# Altium PCB deepshark_pcb.PcbDoc (part 2 of 2)
Units mm, origin at the board's own origin, x right, y up, seen from the top; angles counter-clockwise.
Board outline 200 x 80 mm, 2 copper layers (Top Layer, Bottom Layer); 211 components, 120 nets, 671 pads, 118 vias.
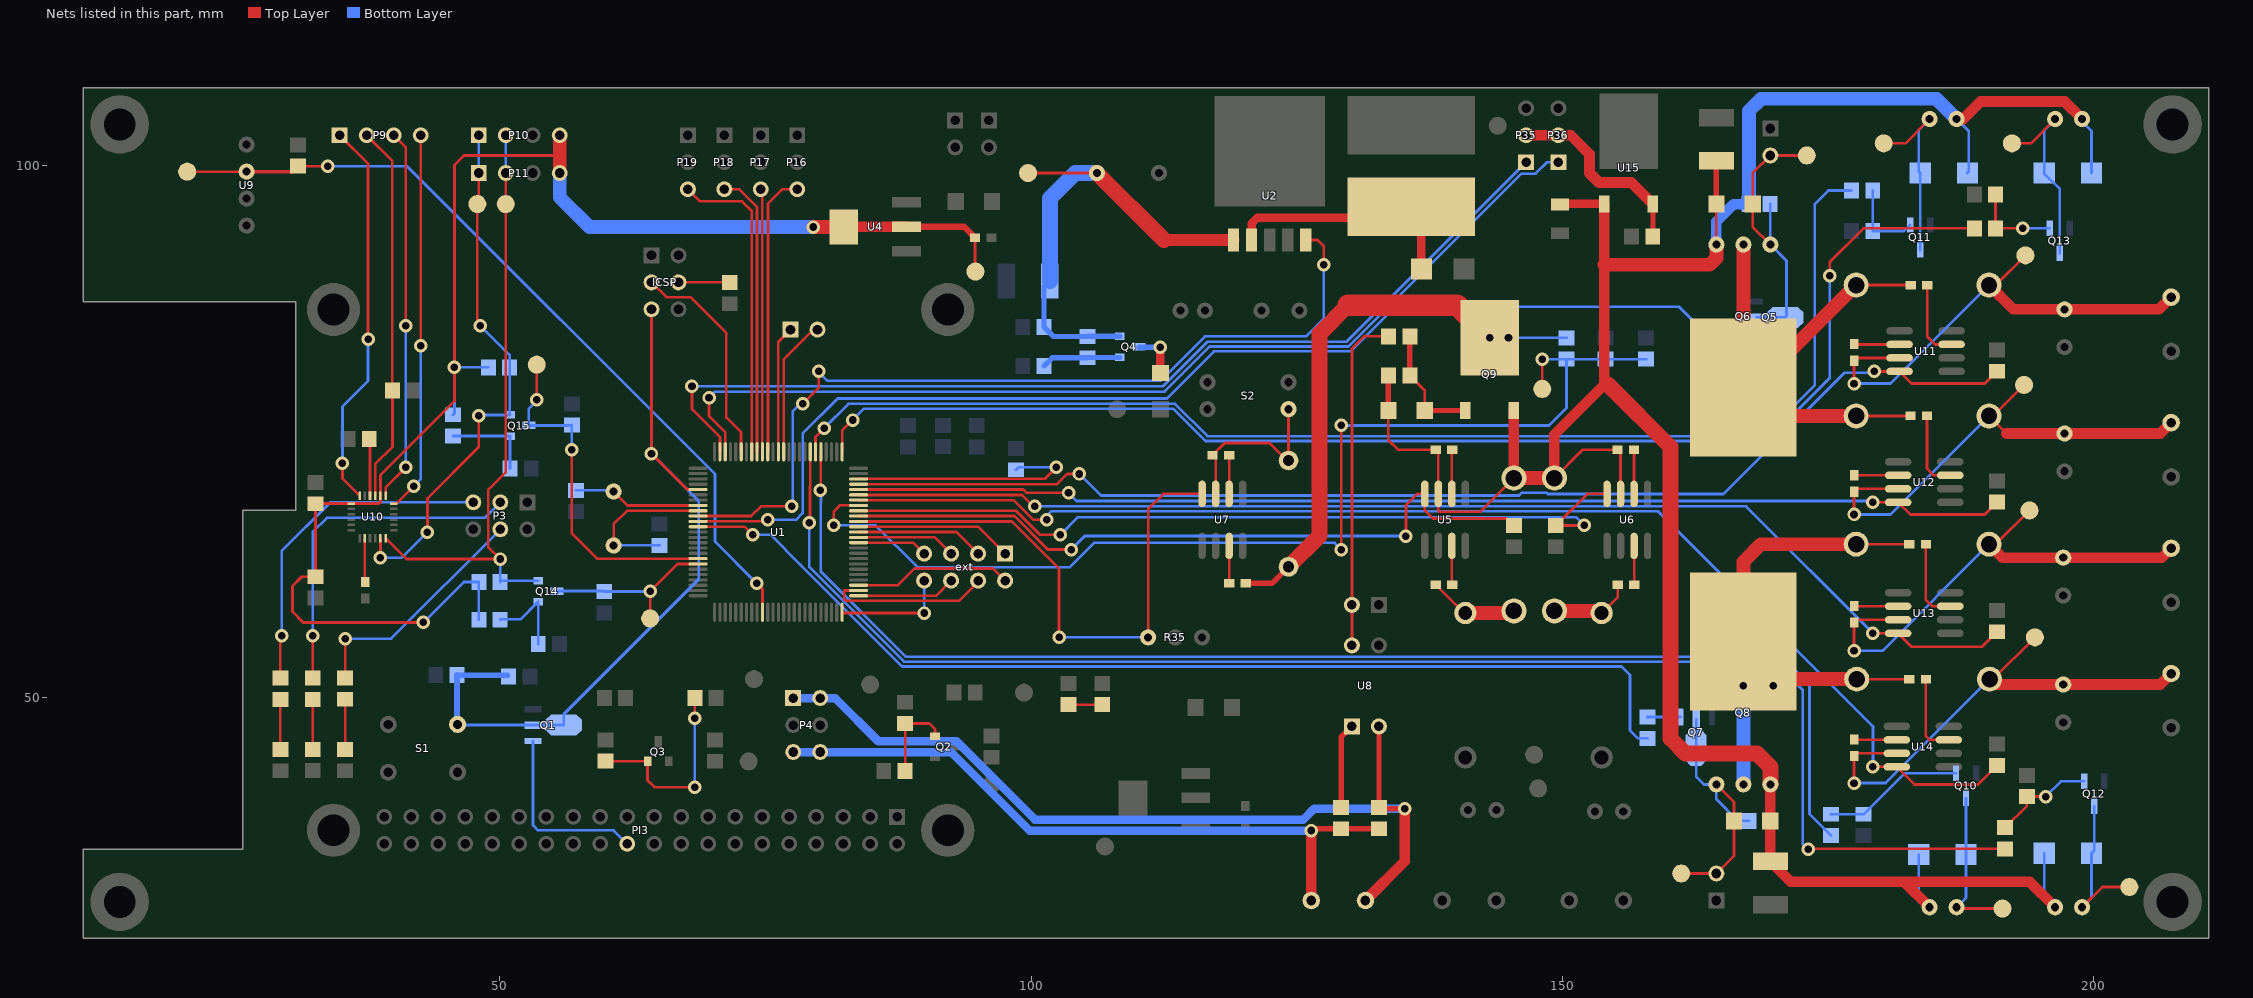
[diagram p2: the nets of this part, all layers, seen from the top]

## Via types
v1: diameter 1.27, hole 0.711, Top Layer to Bottom Layer, 118 vias

## Nets (pads, with @x,y where several pads share a name; then routed paths per layer and width w, separated by ;. In a path a pad name is that pad's centre, name@x,y a point inside that pad or via, vN(x,y) a via of type N, cw(c..) or ccw(c..) an arc to the next point about the centre after c; other vN are vias at no path point) (continued)
Net10_1: 10.1 C17.1 C25.2 C28.1 P10.4 P11.4 R45.1 R46.2 R48.1 R49.2 U4.2 U4.4 U10.8 U10.13 | length 143.4
  Top Layer w0.254: v1(42.799,57.023) 31.496,57.023 30.48,58.039 30.48,60.452 31.353,61.325 C28.1@32.639,61.325 C25.2@32.639,68.199 32.649,68.209 U10.13@36.02,68.209 38.618,68.209 38.755,68.346 U10.8@38.755,68.959 38.755,70.886 45.72,77.851 v1(45.72,81.026) 45.72,100.076 46.609,100.965 55.626,100.965 ; v1(79.502,94.234) v1@79.516,94.248 ; C17.1@94.711,93.218 94.711,90.074 10.1@94.742,90.043
  Top Layer w0.6: U4.2@88.265,94.248 93.681,94.248 C17.1@94.711,93.218
  Top Layer w1: U4.4@82.365,94.248 U4.2@88.265,94.248
  Top Layer w1.3: P11.4@55.626,99.314 55.626,100.965 P10.4@55.626,102.87 ; v1@79.516,94.248 U4.4@82.365,94.248
  Bottom Layer w0.254: v1(42.799,57.023) 46.609,60.833 R46.2@48.022,60.833 R45.1@48.022,57.277 ; R48.1@45.593,76.565 45.72,76.692 v1(45.72,81.026) R49.2@48.911,81.026
  Bottom Layer w1.3: P11.4@55.626,99.314 55.626,97.028 58.42,94.234 v1(79.502,94.234)
Net13_1: 13.1 C20.2 P7.2 Q5.2 Q6.1 R23.2 | length 27.2
  Top Layer w0.254: Q6.1@169.545,92.583 167.885,94.243 C20.2@167.885,96.393 167.885,99.305 P7.2@169.545,100.965 13.1@172.974,100.965
  Bottom Layer w0.254: Q5.2@168.242,85.725 Q5.2@170.942,85.725 171.069,85.852 171.069,91.059 Q6.1@169.545,92.583 169.545,96.377 R23.2@169.529,96.393
Net14_1: 14.1 C21.2 P8.2 Q7.2 Q8.1 R25.2 | length 26
  Top Layer w0.254: 14.1@161.163,33.401 P8.2@164.465,33.401 166.116,35.052 C21.2@166.116,38.354 166.116,40.132 Q8.1@164.465,41.783
  Bottom Layer w0.254: Q7.2@162.56,47.928 Q7.2@162.56,45.228 162.56,42.545 163.322,41.783 Q8.1@164.465,41.783 164.465,40.386 166.497,38.354 R25.2@167.529,38.354
Net15_1: 15.1 C24.2 R30.1 R31.2 U1.93 | length 105.2
  Top Layer w0.254: v1(81.407,66.167) 81.407,67.437 82.025,68.055 83.727,68.055 U1.93@83.75,68.032 ; v1(129.159,63.881) v1(129.159,75.565) ; 15.1@148.082,78.994 v1(148.082,81.788)
  Bottom Layer w0.254: v1(81.407,66.167) 85.344,66.167 89.281,62.23 103.632,62.23 105.918,64.516 128.524,64.516 v1(129.159,63.881) ; v1(129.159,75.565) 148.717,75.565 150.368,77.216 R30.1@150.368,81.804 ; v1(148.082,81.788) 148.098,81.804 R30.1@150.368,81.804 ; R31.2@157.861,81.804 C24.2@154.051,81.804 R30.1@150.368,81.804
Net16_1: 16.1 D11.1 P27.1 Q10.1 | length 15
  Top Layer w0.254: P27.1@187.071,30.226 187.198,30.099 16.1@191.389,30.099
  Bottom Layer w0.254: P27.1@187.071,30.226 187.96,31.115 D11.1@187.96,35.179 Q10.1@187.96,40.481
Net17_1: 17.1 D12.1 P29.1 Q11.1 | length 18.1
  Top Layer w0.254: 17.1@180.213,102.108 182.245,102.108 P29.1@184.531,104.394
  Bottom Layer w0.254: Q11.1@183.642,92.075 D12.1@183.642,99.314 183.515,99.441 183.515,103.378 P29.1@184.531,104.394
Net18_1: 18.1 D13.1 P28.1 Q12.1 | length 15.2
  Top Layer w0.254: P28.1@198.882,30.226 200.787,32.131 18.1@203.327,32.131
  Bottom Layer w0.254: P28.1@198.882,30.226 199.771,31.115 D13.1@199.771,35.306 200.025,35.56 Q12.1@200.025,39.719
Net19_1: 19.1 D14.1 P30.1 Q13.1 | length 18.7
  Top Layer w0.254: 19.1@192.278,102.108 194.056,102.108 P30.1@196.342,104.394
  Bottom Layer w0.254: P30.1@196.342,104.394 195.326,103.378 D14.1@195.326,99.314 195.294,99.282 196.784,97.792 Q13.1@196.784,91.757
Net20_1: 20.1 R44.1 U1.60 U9.2 | length 76.7
  Top Layer w0.254: 20.1@20.574,99.441 U9.2@26.162,99.441 ; R44.1@30.464,99.441 R44.1@30.988,99.965 33.766,99.965 v1(33.782,99.949) ; v1(74.168,60.706) 74.7,60.174 U1.60@74.7,57.982
  Top Layer w0.3: U9.2@26.162,99.441 R44.1@30.464,99.441
  Bottom Layer w0.254: v1(33.782,99.949) 41.275,99.949 70.231,70.993 70.231,64.643 v1(74.168,60.706)
Net21_1: 21.1 P10.2 P11.2 Q14.3 R46.1 U10.24 | length 58.3
  Top Layer w0.254: U10.24@39.245,64.959 41.212,62.992 v1(50.038,62.992) 48.895,64.135 48.895,69.469 50.546,71.12 21.1@50.546,96.393 P11.2@50.546,99.314
  Bottom Layer w0.254: R46.1@50.022,60.833 50.038,60.849 v1(50.038,62.992) ; R46.1@50.149,60.96 Q14.3@53.594,60.96 ; P11.2@50.546,99.314 P10.2@50.546,102.87
Net22_1: 22.1 Q14.2 R47.1 U1.44 | length 16.9
  Top Layer w0.254: 22.1@64.135,57.404 v1(64.135,59.944) 66.723,62.532 U1.44@68.65,62.532
  Bottom Layer w0.254: Q14.2@55.359,59.976 59.769,59.976 R47.1@59.817,59.928 64.119,59.928 v1(64.135,59.944)
Net23_1: 23.1 P10.1 P11.1 Q15.3 R49.1 U10.23 | length 50.7
  Top Layer w0.254: v1(38.735,63.119) 38.755,63.139 U10.23@38.755,64.959 ; v1@43.18,65.659 43.18,68.707 48.006,73.533 v1(48.006,76.454) ; P11.1@48.006,99.314 48.006,96.52 23.1@47.879,96.393 47.879,85.217 v1(48.133,84.963)
  Bottom Layer w0.254: v1(38.735,63.119) 40.767,63.119 v1(43.18,65.532) ; v1(48.006,76.454) 48.101,76.549 Q15.3@50.94,76.549 50.911,76.578 R49.1@50.911,81.026 50.911,82.185 v1(48.133,84.963) ; P11.1@48.006,99.314 P10.1@48.006,102.87
Net24_1: 24.1 Q15.2 R50.1 U1.43 | length 33.1
  Top Layer w0.254: v1(53.467,77.978) 53.467,80.899 24.1@53.721,81.153 ; v1(56.769,73.279) 56.769,65.405 59.142,63.032 U1.43@68.65,63.032
  Bottom Layer w0.254: v1(53.467,77.978) 53.467,77.851 52.705,77.089 Q15.2@52.705,75.565 56.737,75.565 R50.1@56.769,75.597 v1(56.769,73.279)
Net25_1: 25.1 C31.1 P20.2 R52.2 R54.2 U11.7 | length 46.2
  Top Layer w0.254: v1(177.419,79.502) R54.2@177.419,81.661 177.673,81.915 U11.7@181.7,81.915 ; R52.2@190.119,88.773 190.754,88.773 25.1@193.548,91.567
  Top Layer w1: R52.2@190.119,88.773 192.405,86.487 C31.1@197.231,86.487 206.121,86.487 P20.2@207.264,87.63
  Bottom Layer w0.254: v1(177.419,79.502) 180.848,79.502 R52.2@190.119,88.773
Net26_1: 26.1 C32.1 P21.2 R56.2 R58.2 U12.7 | length 45.7
  Top Layer w0.254: v1(177.419,67.183) R58.2@177.419,69.311 177.704,69.596 U12.7@181.573,69.596 ; 191.77,74.803 R56.2@190.119,76.454 190.5,76.454 26.1@193.421,79.375
  Top Layer w1: 191.77,74.803 C32.1@197.231,74.803 206.248,74.803 P21.2@207.264,75.819
  Bottom Layer w0.254: v1(177.419,67.183) 180.848,67.183 R56.2@190.119,76.454
Net27_1: 27.1 C33.1 P22.2 R60.2 R62.2 U13.7 | length 46.9
  Top Layer w0.254: v1(177.419,54.356) R62.2@177.419,57.023 177.673,57.277 U13.7@181.573,57.277 ; R60.2@190.119,64.389 190.754,64.389 27.1@193.929,67.564
  Top Layer w1: R60.2@190.119,64.389 191.389,63.119 C33.1@197.104,63.119 206.375,63.119 P22.2@207.264,64.008
  Bottom Layer w0.254: v1(177.419,54.356) 180.086,54.356 R60.2@190.119,64.389
Net28_1: 28.1 C34.1 P23.2 R64.2 R66.2 U14.7 | length 47.1
  Top Layer w0.254: v1(177.419,41.91) R66.2@177.419,44.45 177.673,44.704 U14.7@181.446,44.704 ; R64.2@190.173,51.689 190.5,51.689 28.1@194.437,55.626
  Top Layer w1: R64.2@190.173,51.689 190.681,51.181 C34.1@197.104,51.181 206.228,51.181 P23.2@207.264,52.217
  Bottom Layer w0.254: v1(177.419,41.91) 180.394,41.91 R64.2@190.173,51.689
NetC2_1: C2.1 U1.34 Y1.2 | length 14.8
  Top Layer w0.254: Y1.2@60.706,64.262 60.706,66.294 61.944,67.532 U1.34@68.65,67.532
  Bottom Layer w0.254: Y1.2@60.706,64.262 60.722,64.278 C2.1@65.024,64.278
NetC3_1: C3.1 U1.33 Y1.1 | length 12.1
  Top Layer w0.254: Y1.1@60.706,69.342 62.016,68.032 U1.33@68.65,68.032
  Bottom Layer w0.254: C3.1@57.15,69.453 60.595,69.453 Y1.1@60.706,69.342
NetC4_2: C4.2 U1.98 | length 23
  Top Layer w0.254: U1.98@83.75,70.532 101.266,70.532 v1(102.362,71.628)
  Bottom Layer w0.254: C4.2@98.552,71.39 98.79,71.628 v1(102.362,71.628)
NetC8_1: C8.1 Q2.1 R3.1 | length 8.2
  Top Layer w0.254: C8.1@88.122,43.053 88.138,43.069 R3.1@88.138,47.514 90.408,47.514 90.934,46.988 Q2.1@90.934,46.311
NetC9_1: C9.1 Q3.1 R6.2 | length 18.8
  Top Layer w0.254: C9.1@59.944,43.974 59.961,43.957 Q3.1@63.893,43.957 63.893,42.176 64.54,41.529 v1(68.326,41.529) ; v1(68.326,48.006) 68.326,49.895 R6.2@68.342,49.911
  Bottom Layer w0.254: v1(68.326,41.529) v1(68.326,48.006)
NetC20_1: C20.1 C21.1 C22.1 C35.2 D9.K D10.K D11.2 D12.2 D13.2 D14.2 P27.2 P28.2 P29.2 P30.2 Q6.3 Q8.3 Q9.3 R15.2 R17.2 R19.2 R21.2 R23.1 R25.1 R27.1 U5.7 U6.7 U15.1 | length 260.2
  Top Layer w0.254: C22.1@133.604,76.962 133.604,74.168 134.493,73.279 R17.2@138.049,73.279 138.303,73.025 U5.7@138.303,69.125 138.303,67.564 138.43,67.437 142.24,67.437 R15.2@145.415,70.612 R15.2@145.415,70.612 ; R27.1@133.604,80.248 R27.1@133.62,80.264 ; R19.2@149.225,70.612 151.892,73.279 R21.2@155.163,73.279 155.448,72.994 U6.7@155.448,69.125 ; C35.2@149.733,96.346 C35.2@149.788,96.401 ; 153.925,79.376 154.304,79.376 ; Q6.3@164.465,92.583 C20.1@164.465,96.393 ; D10.K@169.536,34.569 D10.K@169.545,34.56 ; C21.1@169.536,38.354 C21.1@169.545,38.363 ; P27.2@184.531,30.226 P27.2@184.531,30.353 ; P29.2@187.071,104.394 P29.2@187.706,104.394
  Top Layer w0.5: C22.1@133.604,76.962 R27.1@133.604,80.248 ; C20.1@164.465,96.393 D9.K@164.465,100.457
  Top Layer w0.8: C35.2@149.788,96.401 U15.1@153.925,96.401
  Top Layer w1: R15.2@145.415,70.612 Q9.3@145.414,76.97 ; R19.2@149.225,70.612 149.225,74.676 153.925,79.376 153.925,90.678 U15.1@153.925,96.401 ; D10.K@169.536,34.569 C21.1@169.536,38.354 ; D10.K@169.545,34.56 171.466,32.639 182.118,32.639 ; C21.1@169.545,38.363 Q8.3@169.545,41.783 ; P27.2@184.531,30.226 182.118,32.639 ; P29.2@187.706,104.394 189.357,106.045 197.231,106.045 P30.2@198.882,104.394 ; P28.2@196.342,30.226 193.929,32.639 182.118,32.639
  Top Layer w1.3: R15.2@145.415,70.612 R19.2@149.225,70.612 ; 153.925,90.678 163.83,90.678 164.465,91.313 Q6.3@164.465,92.583
  Top Layer w1.5: 154.304,79.376 160.147,73.533 160.147,46.101 161.544,44.704 168.275,44.704 169.545,43.434 Q8.3@169.545,41.783
  Bottom Layer w0.254: R25.1@169.529,38.354 169.529,41.767 Q8.3@169.545,41.783 ; D11.2@183.515,35.179 183.515,31.242 P27.2@184.531,30.226 ; P29.2@187.071,104.394 188.214,103.251 188.214,99.441 D12.2@188.087,99.314 ; D13.2@195.326,35.306 195.326,31.242 P28.2@196.342,30.226 ; P30.2@198.882,104.394 198.882,104.14 199.771,103.251 D14.2@199.771,99.314
  Bottom Layer w1: Q6.3@164.465,92.583 164.465,94.742 166.116,96.393 R23.1@167.529,96.393
  Bottom Layer w1.3: R23.1@167.529,96.393 167.529,105.172 168.656,106.299 185.166,106.299 P29.2@187.071,104.394
NetC22_2: C22.2 Q9.1 R27.2 R28.1 | length 11.4
  Top Layer w0.254: R27.2@135.62,80.264 137.024,78.86 C22.2@137.024,76.962 C22.2@137.032,76.97
  Top Layer w0.5: R27.2@135.62,80.264 R28.1@135.62,83.947 ; C22.2@137.032,76.97 Q9.1@140.844,76.97
NetC26_2: C26.2 U10.10 | length 5.4
  Top Layer w0.254: C26.2@37.703,74.295 37.775,74.223 U10.10@37.775,68.959
NetC27_1: C27.1 U10.20 | length 4.1
  Top Layer w0.254: U10.20@37.285,64.959 37.285,60.886 C27.1@37.338,60.833
NetC29_1: C29.1 Q14.1 R45.2 | length 8.3
  Bottom Layer w0.254: R45.2@50.022,57.277 50.063,57.318 51.943,57.318 Q14.1@53.596,58.972 53.61,58.958 C29.1@53.61,54.991
NetC30_1: C30.1 Q15.1 R48.2 | length 8.4
  Bottom Layer w0.254: R48.2@45.593,74.565 45.597,74.561 Q15.1@50.942,74.561 C30.1@50.943,71.501
NetC36_2: C36.2 P35.2 P36.2 U15.3 | length 18.7
  Top Layer w0.254: C36.2@158.48,93.345 C36.2@158.495,93.36
  Top Layer w0.5: C36.2@158.495,93.36 U15.3@158.495,96.401
  Top Layer w1: P35.2@146.558,102.87 P36.2@149.606,102.87 150.749,102.87 152.527,101.092 152.527,99.314 153.416,98.425 156.471,98.425 U15.3@158.495,96.401
NetD1_1: D1.1 R9.2 | length 3.2
  Top Layer w0.254: D1.1@103.505,49.292 R9.2@106.68,49.292
NetD2_1: D2.1 R10.1 | length 4.7
  Top Layer w0.254: D2.1@32.385,45.085 R10.1@32.385,49.784
NetD3_1: D3.1 R11.1 | length 4.7
  Top Layer w0.254: D3.1@35.433,45.069 R11.1@35.433,49.8
NetD4_2: D4.2 R12.2 | length 4.7
  Top Layer w0.254: D4.2@29.337,45.069 R12.2@29.337,49.784
NetD6_K: D6.K L1.1 U2.2 | length 23.5
  Top Layer w0.254: L1.1@134.747,95.123 L1.1@135.763,96.139 L1.1@136.716,95.186
  Top Layer w0.8: U2.2@120.728,93.016 120.728,94.566 121.285,95.123 L1.1@134.747,95.123 ; D6.K@136.716,90.287 L1.1@136.716,95.186
NetD7_2: D7.2 R15.1 R16.2 | length 8.6
  Top Layer w0.254: R16.2@138.049,60.579 140.716,57.912 D7.2@140.843,57.912 ; R15.1@145.215,57.912 R15.1@145.415,58.112
  Top Layer w1.3: D7.2@140.843,57.912 R15.1@145.215,57.912
NetD8_2: D8.2 R19.1 R20.2 | length 7.8
  Top Layer w0.254: D8.2@153.47,58.112 D8.2@153.67,57.912 155.194,59.436 R20.2@155.194,60.579
  Top Layer w1.3: R19.1@149.225,58.112 D8.2@153.47,58.112
Netext_1: ext.1 U1.89 | length 14.8
  Top Layer w0.254: U1.89@83.75,66.032 95.004,66.032 ext.1@97.536,63.5
Netext_2: ext.2 U1.78 | length 14.9
  Top Layer w0.254: U1.78@83.75,60.532 87.456,60.532 89.027,62.103 96.393,62.103 ext.2@97.536,60.96
Netext_3: ext.3 U1.88 | length 12.1
  Top Layer w0.254: U1.88@83.75,65.532 92.964,65.532 ext.3@94.996,63.5
Netext_4: ext.4 U1.77 | length 15.7
  Top Layer w0.254: U1.77@83.75,60.032 82.435,60.032 82.423,60.044 82.396,60.044 82.396,59.209 82.398,59.209 82.552,59.055 93.218,59.055 94.996,60.833 ext.4@94.996,60.96
Netext_5: ext.5 U1.87 | length 9.3
  Top Layer w0.254: U1.87@83.75,65.032 90.924,65.032 ext.5@92.456,63.5
Netext_6: ext.6 U1.76 | length 9.3
  Top Layer w0.254: U1.76@83.75,59.532 91.028,59.532 ext.6@92.456,60.96
Netext_7: ext.7 U1.86 | length 6.6
  Top Layer w0.254: U1.86@83.75,64.532 88.884,64.532 ext.7@89.916,63.5
Netext_8: ext.8 U1.75 | length 10.8
  Top Layer w0.254: U1.75@82.2,57.982 82.27,57.912 v1(89.916,57.912)
  Bottom Layer w0.254: v1(89.916,57.912) ext.8@89.916,60.96
NetF1_2: F1.2 Q4.2 | length 4.5
  Top Layer w0.8: F1.2@112.141,80.509 v1(112.141,82.931)
  Bottom Layer w0.254: Q4.2@110.096,82.963 Q4.2@110.128,82.931
  Bottom Layer w0.5: Q4.2@110.128,82.931 v1(112.141,82.931)
NetICSP_4: ICSP.4 R1.1 | length 4.8
  Top Layer w0.254: ICSP.4@66.802,89.027 71.612,89.027 R1.1@71.628,89.011
NetP3_5: P3.5 R12.1 | length 32
  Top Layer w0.254: R12.1@29.337,51.784 29.337,55.626 v1(29.464,55.753)
  Bottom Layer w0.254: v1(29.464,55.753) 29.464,63.754 34.036,68.326 P3.5@47.498,68.326
NetP9_1: P9.1 U10.12 | length 36.7
  Top Layer w0.254: P9.1@34.925,102.87 37.592,100.203 v1(37.592,83.693) ; v1(35.179,72.009) 35.179,70.575 U10.12@36.795,68.959
  Bottom Layer w0.254: v1(35.179,72.009) 35.179,77.343 37.592,79.756 v1(37.592,83.693)
NetP9_2: P9.2 R51.2 U10.9 | length 35.6
  Top Layer w0.254: P9.2@37.465,102.87 39.878,100.457 39.878,78.883 R51.2@39.894,78.867 39.894,73.549 38.265,71.92 U10.9@38.265,68.959
NetP9_3: P9.3 U10.7 | length 35.2
  Top Layer w0.254: U10.7@39.245,68.959 39.245,69.725 v1(41.148,71.628) ; P9.3@40.005,102.87 41.148,101.727 v1(41.148,84.963)
  Bottom Layer w0.254: v1(41.148,71.628) v1(41.148,84.963)
NetP9_4: P9.4 U10.6 | length 35.9
  Top Layer w0.254: U10.6@40.02,68.209 40.269,68.209 v1(41.91,69.85) ; v1(42.545,83.058) P9.4@42.545,102.87
  Bottom Layer w0.254: v1(41.91,69.85) 42.545,70.485 v1(42.545,83.058)
NetP14_2: P14.2 R28.2 U8.4 | length 31.9
  Top Layer w0.254: U8.4@130.175,54.864 P14.2@130.175,58.674 130.175,82.804 131.318,83.947 R28.2@133.62,83.947
NetP16_3: P16.3 U1.15 | length 26.7
  Top Layer w0.254: U1.15@75.2,73.082 75.223,73.105 75.223,96.432 76.581,97.79 P16.3@77.978,97.79
NetP17_3: P17.3 U1.16 | length 24.8
  Top Layer w0.254: P17.3@74.549,97.79 74.677,97.662 74.677,73.105 U1.16@74.7,73.082
NetP18_3: P18.3 U1.17 | length 26.8
  Top Layer w0.254: P18.3@71.12,97.79 72.517,97.79 74.2,96.107 U1.17@74.2,73.082
NetP19_3: P19.3 U1.18 | length 29.5
  Top Layer w0.254: P19.3@67.691,97.79 68.834,96.647 72.771,96.647 73.7,95.718 U1.18@73.7,73.082
NetP35_1: P35.1 U1.24 | length 94.5
  Top Layer w0.254: v1(68.072,79.248) 68.072,77.089 70.7,74.461 U1.24@70.7,73.082
  Bottom Layer w0.254: v1(68.072,79.248) 112.395,79.248 116.586,83.439 129.667,83.439 P35.1@146.558,100.33
NetP36_1: P36.1 U1.23 | length 94.8
  Top Layer w0.254: v1(69.675,78.184) 69.675,76.454 71.2,74.929 U1.23@71.2,73.082
  Bottom Layer w0.254: v1(69.675,78.184) 70.231,78.74 112.529,78.74 116.774,82.985 129.855,82.985 146.123,99.253 147.443,99.253 148.52,100.33 P36.1@149.606,100.33
NetPI3_22: PI3.22 Q1.1 | length 17.5
  Bottom Layer w0.254: Q1.1@53.107,45.871 53.107,37.952 53.594,37.465 60.706,37.465 PI3.22@61.976,36.195
NetQ4_1: Q4.1 R13.2 R14.2 | length 7.5
  Bottom Layer w0.254: R13.2@105.283,81.931 R13.2@105.311,81.959
  Bottom Layer w0.5: R14.2@101.203,81.153 101.981,81.931 R13.2@105.283,81.931 ; R13.2@105.311,81.959 Q4.1@108.333,81.959
NetQ5_2: Q5.1 R24.2 | length 2.6
  Bottom Layer w0.254: R24.2@168.005,81.661 168.042,81.698 Q5.1@168.042,84.225
NetQ6_2: Q6.2 Q6.4 R52.1 R53.2 R56.1 R57.2 | length 50
  Top Layer w0.254: Q6.4@167.967,79.121 Q6.4@167.005,79.121 Q6.4@169.672,76.454 ; R56.1@177.619,76.454 R57.2@182.722,76.454 ; R52.1@177.619,88.773 R53.2@182.753,88.773
  Top Layer w1.3: Q6.4@167.005,79.121 Q6.2@167.005,92.583 ; Q6.4@167.967,79.121 R52.1@177.619,88.773 ; Q6.4@169.672,76.454 R56.1@177.619,76.454
NetQ7_2: Q7.1 R26.1 | length 3.1
  Bottom Layer w0.254: R26.1@157.988,48.117 157.999,48.128 Q7.1@161.06,48.128
NetQ8_2: Q8.2 Q8.4 R60.1 R61.2 R64.1 R65.2 | length 53
  Top Layer w0.254: Q8.4@167.005,55.245 Q8.4@170.561,51.689 ; R60.1@177.619,64.389 R61.2@182.626,64.389 ; R64.1@177.673,51.689 R65.2@182.626,51.689
  Top Layer w1.3: Q8.4@167.005,55.245 167.005,62.738 168.656,64.389 R60.1@177.619,64.389 ; Q8.4@170.561,51.689 R64.1@177.673,51.689
  Bottom Layer w1.3: Q8.2@167.005,41.783 v1(167.005,51.054) v1(169.799,51.054)
NetQ9_4: Q9.4 R30.2 R32.2 R33.2 | length 53.4
  Top Layer w0.5: R33.2@120.173,60.706 122.649,60.706 R32.2@124.206,62.263
  Top Layer w1.5: R32.2@124.206,62.263 127.127,65.184 127.127,84.201 129.794,86.868
  Top Layer w2: 129.794,86.868 140.081,86.868 v1(143.129,83.82)
  Bottom Layer w0.254: v1(143.129,83.82) v1(144.907,83.82) 144.923,83.804 R30.2@150.368,83.804
NetQ10_1: Q10.3 R36.2 R37.1 | length 13.3
  Bottom Layer w0.254: R36.2@175.26,38.973 R37.1@178.308,38.973 182.166,42.831 Q10.3@187.01,42.831
NetQ11_1: Q11.3 R38.2 R39.1 | length 7.6
  Bottom Layer w0.254: R38.2@179.181,97.663 R39.1@179.181,93.853 182.12,93.853 Q11.3@182.692,94.425
NetQ12_1: Q12.3 R40.2 R41.1 | length 9.8
  Top Layer w0.254: R40.2@191.643,37.719 193.675,39.751 R41.1@193.675,40.64 v1(195.453,40.64)
  Bottom Layer w0.254: v1(195.453,40.64) 196.882,42.069 Q12.3@199.075,42.069
NetQ13_1: Q13.3 R42.2 R43.1 | length 8.3
  Top Layer w0.254: R43.1@190.738,97.282 R42.2@190.738,94.107 v1(193.294,94.107)
  Bottom Layer w0.254: v1(193.294,94.107) Q13.3@195.834,94.107
NetR16_1: R16.1 U5.3 | length 3.7
  Top Layer w0.254: U5.3@139.573,64.225 139.573,60.61 R16.1@139.604,60.579
NetR17_1: R17.1 U5.6 | length 4.2
  Top Layer w0.254: U5.6@139.573,69.125 139.573,73.248 R17.1@139.604,73.279
NetR18_2: R18.2 U1.91 U5.8 | length 69.1
  Top Layer w0.254: U1.91@83.75,67.032 98.401,67.032 101.552,63.881 v1(103.759,63.881) ; v1@135.128,65.151 135.255,65.278 135.255,68.072 136.308,69.125 U5.8@137.033,69.125 137.033,67.564 137.795,66.802 144.764,66.802 R18.2@145.415,66.151
  Bottom Layer w0.254: v1(103.759,63.881) 105.029,65.151 v1(135.255,65.151)
NetR20_1: R20.1 U6.3 | length 3.7
  Top Layer w0.254: U6.3@156.718,64.225 156.749,64.194 R20.1@156.749,60.579
NetR21_1: R21.1 U6.6 | length 4.2
  Top Layer w0.254: U6.6@156.718,69.125 R21.1@156.718,73.279
NetR22_2: R22.2 U1.92 U6.8 | length 78.9
  Top Layer w0.254: U1.92@83.75,67.532 98.584,67.532 100.838,65.278 v1(102.743,65.278) ; v1(152.019,66.167) 152.003,66.151 R22.2@149.352,66.151 152.326,69.125 U6.8@154.178,69.125
  Bottom Layer w0.254: v1(102.743,65.278) 104.394,66.929 151.257,66.929 v1(152.019,66.167)
NetR24_1: R24.1 U1.36 | length 112.2
  Top Layer w0.254: U1.36@68.65,66.532 68.673,66.555 75.064,66.555 v1(75.184,66.675)
  Bottom Layer w0.254: v1(75.184,66.675) 77.851,66.675 78.486,67.31 78.486,74.803 81.788,78.105 112.776,78.105 117.202,82.531 130.043,82.531 134.253,86.741 160.925,86.741 R24.1@166.005,81.661
NetR26_2: R26.2 U1.37 | length 100.7
  Top Layer w0.254: U1.37@68.658,66.04 U1.37@68.65,66.032 73.033,66.032 v1(73.787,65.278)
  Bottom Layer w0.254: v1(73.787,65.278) 75.438,65.278 75.448,65.288 78.305,62.43 78.305,62.411 87.837,52.879 155.528,52.879 156.337,52.07 156.337,46.863 157.083,46.117 R26.2@157.988,46.117
NetR29_1: R29.1 U8.1 | length 8.1
  Top Layer w0.5: R29.1@129.159,39.608 129.159,46.228 U8.1@130.175,47.244
NetR32_1: R32.1 R34.2 S2.2 U7.7 | length 16.9
  Top Layer w0.254: U7.7@117.348,69.125 117.348,72.486 R34.2@117.063,72.771 118.206,73.914 122.428,73.914 124.079,72.263 R32.1@124.206,72.263 S2.2@124.206,77.089
NetR33_1: R33.1 U7.3 | length 3.5
  Top Layer w0.254: R33.1@118.618,60.706 U7.3@118.618,64.225
NetR34_1: R34.1 U7.6 | length 3.6
  Top Layer w0.254: U7.6@118.618,69.125 R34.1@118.618,72.771
NetR35_1: R35.1 U1.90 U7.8 | length 53.3
  Top Layer w0.254: U1.90@83.75,66.532 98.187,66.532 102.616,62.103 v1(102.616,55.626) ; R35.1@110.998,55.626 110.998,67.691 112.432,69.125 U7.8@116.078,69.125
  Bottom Layer w0.254: v1(102.616,55.626) R35.1@110.998,55.626
NetR36_1: R36.1 U1.5 | length 123.8
  Top Layer w0.254: v1(80.137,69.469) 80.177,69.509 80.177,73.059 U1.5@80.2,73.082
  Bottom Layer w0.254: v1(80.137,69.469) 80.21,69.396 80.21,68.489 80.191,68.47 80.191,61.809 88.213,53.787 170.627,53.787 173.228,51.186 173.228,39.005 R36.1@175.26,36.973
NetR38_1: R38.1 U1.6 | length 121
  Top Layer w0.254: U1.6@79.7,73.082 79.7,74.493 v1(80.518,75.311)
  Bottom Layer w0.254: v1(80.518,75.311) 82.804,77.597 113.538,77.597 116.586,74.549 168.91,74.549 173.736,79.375 173.736,96.393 175.006,97.663 R38.1@177.181,97.663
NetR40_1: R40.1 U1.7 | length 143
  Top Layer w0.254: v1@79.175,66.367 v1(79.121,66.421) 79.175,66.475 79.175,69.867 79.2,69.892 U1.7@79.2,73.082 U1.7@79.223,73.059 ; v1(173.101,35.687) 173.133,35.719 R40.1@191.643,35.719
  Bottom Layer w0.254: v1(79.121,66.421) 79.121,62.237 88.025,53.333 169.933,53.333 172.593,50.673 172.593,36.195 v1(173.101,35.687)
NetR42_1: R42.1 U1.1 | length 125.3
  Top Layer w0.254: U1.1@82.2,73.082 82.2,75.088 v1(83.185,76.073) ; v1(175.133,89.662) 175.133,90.932 178.308,94.107 R42.1@188.738,94.107
  Bottom Layer w0.254: v1(83.185,76.073) 84.255,77.143 113.35,77.143 116.398,74.095 169.218,74.095 175.133,80.01 v1(175.133,89.662)
NetR53_1: R53.1 U11.3 | length 7.5
  Top Layer w0.254: R53.1@184.308,88.773 184.308,83.916 185.039,83.185 U11.3@186.6,83.185
NetR54_1: R54.1 U11.6 | length 4.3
  Top Layer w0.254: R54.1@177.419,83.216 177.45,83.185 U11.6@181.7,83.185
NetR55_2: R55.2 U1.97 U11.8 | length 114.3
  Top Layer w0.254: U1.97@83.75,70.032 102.417,70.032 103.378,70.993 v1(104.521,70.993) ; v1(179.324,80.645) U11.8@181.7,80.645 182.843,79.502 189.722,79.502 R55.2@190.881,80.661
  Bottom Layer w0.254: v1(104.521,70.993) 106.553,68.961 145.888,68.961 146.142,69.215 148.498,69.215 148.603,69.11 165.122,69.11 176.53,80.518 179.197,80.518 v1(179.324,80.645)
NetR57_1: R57.1 U12.3 | length 7.4
  Top Layer w0.254: R57.1@184.277,76.454 184.277,71.501 184.912,70.866 U12.3@186.473,70.866
NetR58_1: R58.1 U12.6 | length 4.2
  Top Layer w0.254: R58.1@177.419,70.866 U12.6@181.573,70.866
NetR59_2: R59.2 U1.96 U12.8 | length 108.6
  Top Layer w0.254: U1.96@83.76,69.542 U1.96@83.75,69.532 99.263,69.532 99.314,69.481 99.314,69.469 99.568,69.215 v1(103.505,69.215) ; v1(179.197,68.326) U12.8@181.573,68.326 182.716,67.183 189.722,67.183 R59.2@190.881,68.342
  Bottom Layer w0.254: v1(103.505,69.215) 104.267,68.453 179.07,68.453 v1(179.197,68.326)
NetR61_1: R61.1 U13.3 | length 7.8
  Top Layer w0.254: R61.1@184.181,64.389 184.181,59.151 184.785,58.547 U13.3@186.473,58.547
NetR62_1: R62.1 U13.6 | length 4.2
  Top Layer w0.254: R62.1@177.419,58.578 177.45,58.547 U13.6@181.573,58.547
NetR63_2: R63.2 U1.95 U13.8 | length 113.6
  Top Layer w0.254: U1.95@83.75,69.032 83.767,69.015 99.126,69.015 100.196,67.945 v1(100.33,67.945) ; v1(179.197,56.007) U13.8@181.573,56.007 182.843,54.737 189.468,54.737 R63.2@190.881,56.15
  Bottom Layer w0.254: v1(100.33,67.945) 167.259,67.945 v1(179.197,56.007)
NetR65_1: R65.1 U14.3 | length 7.7
  Top Layer w0.254: R65.1@184.181,51.689 184.181,46.324 184.531,45.974 U14.3@186.346,45.974
NetR66_1: R66.1 U14.6 | length 4
  Top Layer w0.254: R66.1@177.419,46.005 177.45,45.974 U14.6@181.446,45.974
NetR67_2: R67.2 U1.94 U14.8 | length 122.6
  Top Layer w0.254: U1.94@83.75,68.532 98.346,68.532 100.203,66.675 v1(101.473,66.675) ; v1(179.197,43.434) U14.8@181.446,43.434 183.097,41.783 189.087,41.783 R67.2@190.881,43.577
  Bottom Layer w0.254: v1(101.473,66.675) 101.092,66.675 101.908,67.491 158.95,67.491 179.197,47.244 v1(179.197,43.434)
NetRX2_1: RX2.1 U1.13 | length 12
  Top Layer w0.254: U1.13@76.2,73.082 76.2,83.439 RX2.1@77.343,84.582
NetRX2_2: RX2.2 U1.12 | length 13
  Top Layer w0.254: U1.12@76.7,73.082 76.7,81.78 79.502,84.582 RX2.2@79.883,84.582
PLC: P3.3 R10.2 | length 32.6
  Top Layer w0.254: R10.2@32.385,51.784 v1(32.385,55.753)
  Bottom Layer w0.254: v1(32.385,55.753) 32.385,65.532 33.716,66.863 48.575,66.863 P3.3@50.038,68.326
R_ONOFF: U1.35 U2.5 | length 82.7
  Top Layer w0.254: U1.35@68.65,67.032 73.636,67.032 74.549,67.945 v1(77.47,67.945) ; v1@78.486,78.105 v1(78.486,77.597) 80.01,79.121 v1(80.01,80.645) ; U2.5@125.828,93.016 126.948,93.016 127.508,92.456 v1(127.508,90.678)
  Bottom Layer w0.254: v1(77.47,67.945) 77.543,68.018 77.543,76.889 78.251,77.597 v1(78.486,77.597) ; v1(80.01,80.645) 80.01,80.591 80.845,79.756 112.141,79.756 116.332,83.947 125.857,83.947 127.508,85.598 v1(127.508,90.678)
RESET: C1.2 ICSP.5 Q1.2 R2.1 S1.2 U1.30 | length 71.6
  Top Layer w0.254: ICSP.5@64.262,86.487 v1(64.262,72.898) 67.628,69.532 U1.30@68.65,69.532
  Bottom Layer w0.254: S1.2@45.958,47.485 S1.2@46.017,47.426 46.072,47.371 Q1.2@53.307,47.371 Q1.2@56.007,47.371 56.007,48.387 68.707,61.087 68.707,68.453 v1(64.262,72.898) ; R2.1@50.689,52.07 R2.1@50.816,51.943
  Bottom Layer w0.5: C1.2@45.958,52.07 R2.1@50.689,52.07
  Bottom Layer w0.6: S1.2@45.958,47.485 C1.2@45.958,52.07
SCK: ICSP.3 U1.20 | length 20.8
  Top Layer w0.254: ICSP.3@64.262,89.027 65.659,87.63 67.945,87.63 71.301,84.274 71.301,76.31 72.677,74.934 72.677,73.105 U1.20@72.7,73.082
T_A: C23.2 P2.2 P4.1 P4.2 U8.2 | length 82.9
  Top Layer w0.254: C23.2@132.715,39.608 C23.2@132.826,39.497
  Top Layer w0.5: C23.2@132.715,39.608 U8.2@132.715,47.244 ; C23.2@132.826,39.497 v1(135.128,39.497)
  Top Layer w1: P2.2@131.445,30.861 135.128,34.544 v1(135.128,39.497)
  Bottom Layer w0.8: P4.1@77.597,49.911 P4.2@80.137,49.911 81.534,49.911 85.598,45.847 92.971,45.847 100.337,38.481 125.603,38.481 126.619,39.497 v1(135.128,39.497)
T_B: C23.1 P2.1 P4.5 P4.6 R29.2 | length 64.8
  Top Layer w0.254: v1(126.345,37.445) v1@126.508,37.608
  Top Layer w0.5: v1@126.508,37.608 R29.2@129.159,37.608 C23.1@132.715,37.608
  Top Layer w1: P2.1@126.345,30.861 v1(126.345,37.445)
  Bottom Layer w0.8: P4.5@77.597,44.831 P4.6@80.137,44.831 92.456,44.831 99.842,37.445 v1(126.345,37.445)
TP: P3.4 R11.2 | length 22.6
  Top Layer w0.254: R11.2@35.433,51.8 v1(35.433,55.499)
  Bottom Layer w0.254: v1(35.433,55.499) 39.751,55.499 P3.4@50.038,65.786
VIN0: 7.1 C11.2 C12.1 D5.K Q4.3 R13.1 U2.1 | length 47.2
  Top Layer w0.254: 7.1@99.695,99.314 C12.1@106.172,99.314
  Top Layer w1.1: 112.47,93.016 U2.1@119.028,93.016
  Top Layer w1.5: C12.1@106.172,99.314 112.47,93.016
  Bottom Layer w0.254: D5.K@101.203,88.614 D5.K@101.743,89.154 ; R13.1@105.283,83.931 R13.1@105.299,83.947
  Bottom Layer w0.5: D5.K@101.203,88.614 C11.2@101.203,84.836 102.108,83.931 R13.1@105.283,83.931 ; R13.1@105.299,83.947 Q4.3@108.331,83.947
  Bottom Layer w1.5: D5.K@101.743,89.154 101.743,96.917 104.14,99.314 C12.1@106.172,99.314
pads on no net: P4.3 P4.4 PI3.1 PI3.3 PI3.5 PI3.7 PI3.11 PI3.12 PI3.13 PI3.15 PI3.16 PI3.17 PI3.18 PI3.19 PI3.21 PI3.23 PI3.24 PI3.26 PI3.27 PI3.28 PI3.29 PI3.31 PI3.32 PI3.33 PI3.35 PI3.36 PI3.37 PI3.38 PI3.40 R35.2 S1.3 S1.4 S2.3 S2.4 U1.2 U1.3 U1.4 U1.8 U1.9 U1.14 U1.19 U1.25 U1.26 U1.27 U1.28 U1.29 U1.38 U1.39 U1.40 U1.41 U1.42 U1.47 U1.48 U1.49 U1.50 U1.51 U1.52 U1.53 U1.54 U1.55 U1.56 U1.57 U1.58 U1.59 U1.63 U1.64 U1.65 U1.66 U1.67 U1.68 U1.69 U1.70 U1.71 U1.72 U1.73 U1.74 U1.79 U1.82 U1.83 U1.84 U1.85 U5.2 U5.5 U6.2 U6.5 U7.2 U7.5 U9.3 U10.2 U10.3 U10.4 U10.5 U10.14 U10.15 U10.16 U10.17 U10.19 U10.21 U10.22 U11.2 U11.5 U12.2 U12.5 U13.2 U13.5 U14.2 U14.5

## Polygon pours and split planes (outlines as drawn)
NetC20_1 on Top Layer "netc20-1-5" (hatched 90Degree grid 0 track 0.152, remove dead copper, pour order 22): 197.612,107.315 197.612,91.313 210.795,91.313 210.795,97.155 209.042,97.155 203.454,102.743 203.454,107.315 197.612,107.315
NetC20_1 on Top Layer "netc20-1-4" (hatched 90Degree grid 0 track 0.152, remove dead copper, pour order 20): 175.26,32.131 181.991,32.131 184.912,29.21 184.912,28.067 184.912,27.315 175.26,27.315 175.26,32.131
NetC20_1 on Top Layer "netc20-1-3" (hatched 90Degree grid 0 track 0.152, remove dead copper, pour order 18): 149.733,74.549 153.924,78.74 158.115,74.549 149.733,74.549
NetC20_1 on Top Layer "netc20-1-2" (hatched 90Degree grid 0 track 0.152, remove dead copper, pour order 16): 154.432,90.043 160.782,90.043 160.782,73.914 160.02,73.914 158.75,75.184 154.432,79.502 154.432,90.043
NetC20_1 on Top Layer "netc20-1-1" (hatched 90Degree grid 0 track 0.152, remove dead copper, pour order 14): 151.257,96.012 153.416,96.012 153.416,79.629 151.257,77.47 151.257,96.012
+5V on Top Layer "5v-3" (hatched 90Degree grid 0 track 0.152, remove dead copper, pour order 10): 66.929,54.483 68.326,55.88 78.613,55.88 100.076,55.88 101.473,54.483 66.929,54.483
+5V on Top Layer "5v-2" (hatched 90Degree grid 0 track 0.152, remove dead copper, pour order 8): 105.918,74.295 105.918,53.848 108.331,53.848 108.331,68.199 114.427,74.295 105.918,74.295
+5V on Top Layer "5v-1" (hatched 90Degree grid 0 track 0.152, remove dead copper, pour order 6): 105.664,75.311 105.664,82.296 82.423,82.296 81.28,81.153 81.28,77.851 86.36,77.851 86.36,75.311 105.664,75.311
Net9_1 on Top Layer "pi-33-vcc" (hatched 90Degree grid 0 track 0.152, remove dead copper, pour order 2): 25.795,41.529 28.702,41.529 28.702,34.163 85.344,34.163 86.868,34.163 89.789,31.242 94.488,31.242 94.488,27.315 18.796,27.315 18.796,35.687 25.795,35.687 25.795,41.529
GND on Bottom Layer "bottom-gnd" (hatched 90Degree grid 0 track 0.152, remove dead copper, pour order 24): 10.795,107.315 10.795,87.195 30.795,87.195 30.795,67.56 25.795,67.56 25.795,35.687 10.795,35.687 10.795,27.315 210.795,27.315 210.795,107.315 10.795,107.315

## Keep-outs
Keep-Out Layer:
  the board outline again, w0.254

## Silkscreen, mask and mechanical layers (free items; w line width, h text height)
Top Overlay:
  text "GND" at 88.392,103.886 h1
  text "GND" at 63.246,102.362 h1
  text "+5V" at 88.392,101.092 h1
  text "+5V" at 63.246,99.568 h1
  text "PPM" at 63.246,97.155 h1
  text "I2C" at 54.356,96.139 h1
  text "MAIN CONTROL BOARD 1.0" at 40.64,30.607 h1.52
  text "B" at 122.047,30.099 h1.52

## Text inside footprints (layer, text, board x,y; h text height)
ext: Top Overlay "8" at 88.138,61.468 h1 r180; Top Overlay "7" at 87.503,62.992 h1; Top Overlay "1" at 99.695,62.865 h1; Top Overlay "2" at 99.441,60.325 h1
ICSP: Top Overlay "+5v" at 69.596,90.17 h1 r90
P3: Top Overlay "6" at 45.847,66.167 h1 r180; Top Overlay "5" at 45.847,68.834 h1 r180; Top Overlay "2" at 54.991,66.294 h1 r180; Top Overlay "1" at 54.737,68.834 h1 r180
P4: Top Overlay "6" at 79.629,43.307 h1 r270; Top Overlay "5" at 77.089,43.307 h1 r270; Top Overlay "2" at 79.629,52.197 h1 r270; Top Overlay "1" at 77.089,51.943 h1 r270
PI3: Top Overlay "39" at 37.973,40.386 h1.02; Top Overlay "40" at 37.973,33.401 h1.02; Top Overlay "2" at 89.154,34.925 h1.02; Top Overlay "1" at 89.281,38.989 h1.02